# EAGLE board back (EAGLE 6.5.0)

Size 100 x 80 mm. Coordinates in mm from the lower left corner, seen from the top.
Outline: 0,0 100,0 100,80 0,80 0,0
Copper layers (1*16): Top 0.035mm / dielectric 1.5mm / Bottom 0.035mm
Design rules "default": minimum track width 10mil, minimum drill 24mil, track to track 8mil, track to pad 8mil, pad to pad 8mil, via to via 8mil, smd to smd 8mil, copper to edge 40mil, drill to drill 8mil, minimum pad ring 10mil, minimum via ring 8mil, stop-mask expansion 4mil, vias tented up to drill 0mil, thermal gap 10mil

## Footprints (pad centres in the part's own frame; a part is rotated, then mirrored left to right if it is on the bottom)
0805 = smd 0.8 x 1.2: 1 -0.9,0; 2 0.9,0
QFP80P1200X1200X120-44N = smd 1.55 x 0.55: 1 -5.75,4; 2 -5.75,3.2; 3 -5.75,2.4; 4 -5.75,1.6; 5 -5.75,0.8; 6 -5.75,0; 7 -5.75,-0.8; 8 -5.75,-1.6; 9 -5.75,-2.4; 10 -5.75,-3.2; 11 -5.75,-4; 23 5.75,-4; 24 5.75,-3.2; 25 5.75,-2.4; 26 5.75,-1.6; 27 5.75,-0.8; 28 5.75,0; 29 5.75,0.8; 30 5.75,1.6; 31 5.75,2.4; 32 5.75,3.2; 33 5.75,4 | smd 0.55 x 1.55: 12 -4,-5.75; 13 -3.2,-5.75; 14 -2.4,-5.75; 15 -1.6,-5.75; 16 -0.8,-5.75; 17 0,-5.75; 18 0.8,-5.75; 19 1.6,-5.75; 20 2.4,-5.75; 21 3.2,-5.75; 22 4,-5.75; 34 4,5.75; 35 3.2,5.75; 36 2.4,5.75; 37 1.6,5.75; 38 0.8,5.75; 39 0,5.75; 40 -0.8,5.75; 41 -1.6,5.75; 42 -2.4,5.75; 43 -3.2,5.75; 44 -4,5.75
SOT23-5 = smd 0.69 x 0.99: 1 -0.95,-1.29; 2 0,-1.29; 3 0.95,-1.29; 4 0.95,1.3; 5 -0.95,1.3
JST-3-PTH = drill 0.7 pad 1.626: 1 -2,-5; 2 0,-5; 3 2,-5
L0402 = smd 0.5 x 0.5: 1 -0.508,0; 2 0.508,0
HX1 = drill 0.8 square: 0V 25.4,-8.89; EN 20.32,-8.89; RFGND1 0,-8.89; RFGND2 5.08,-8.89; RFOUT 2.54,-8.89; TXD 27.94,-8.89; VCC 22.86,-8.89 | smd 0.813 x 1.676: BODYGND1 -1.905,8.255; BODYGND2 36.195,8.255
04P = drill 0.914 long: 1 -3.81,0; 2 -1.27,0; 3 1.27,0; 4 3.81,0
MS5611-01BA01 = smd 1.3 x 0.6: 1 -1.2,1.875; 2 -1.2,0.625; 3 -1.2,-0.625; 4 -1.2,-1.875; 5 1.2,-1.875; 6 1.2,-0.625; 7 1.2,0.625; 8 1.2,1.875
M10382-A1 = smd 1 x 2: 1 -1.05,12.1; 2 -2.65,12.1; 3 -4.25,12.1; 18 -1.6,-11.7; 19 0,-11.7; 20 1.6,-11.7; 35 4.25,12.1; 36 2.65,12.1 | smd 2 x 1: 4 -4.75,9.6; 5 -4.75,8; 6 -4.75,6.4; 7 -4.75,4.8; 8 -4.75,3.2; 9 -4.75,1.6; 10 -4.75,0; 11 -4.75,-1.6; 12 -4.75,-3.2; 13 -4.75,-4.8; 14 -4.75,-6.4; 15 -4.75,-8; 16 -4.75,-9.6; 17 -4.75,-11.2; 21 4.75,-11.2; 22 4.75,-9.6; 23 4.75,-8; 24 4.75,-6.4; 25 4.75,-4.8; 26 4.75,-3.2; 27 4.75,-1.6; 28 4.75,0; 29 4.75,1.6; 30 4.75,3.2; 31 4.75,4.8; 32 4.75,6.4; 33 4.75,8; 34 4.75,9.6
CR-123-A_HOLDER = drill 1.5: + -19.05,0; - 19.05,0 | drill 2: P$3 -19.05,8.128 | drill 3.2: P$4 -12.751,0; P$5 12.751,0
AVR-ISP-6 = drill 1.016 square: 1 -2.54,-1.27 | drill 1.016 octagon: 2 -2.54,1.27; 3 0,-1.27; 4 0,1.27; 5 2.54,-1.27; 6 2.54,1.27
BU-SMA-V = drill 1.27: 1 0,0 | drill 1.778: 2 -2.55,2.55; 3 2.55,2.55; 4 2.55,-2.55; 5 -2.55,-2.55

## Placement (x,y rotation side)
C1  22pF  [0805]  -24.13,-269.24 0 top  (outside the outline)
C2  22pF  [0805]  -27.94,-269.24 0 top  (outside the outline)
C3  22pF  [0805]  -31.75,-269.24 0 top  (outside the outline)
C5  22pF  [0805]  -39.37,-269.24 0 top  (outside the outline)
C6  18pF  [0805]  -43.18,-269.24 0 top  (outside the outline)
C7  100nF  [0805]  -46.99,-308.61 0 top  (outside the outline)
IC1  [QFP80P1200X1200X120-44N]  36.83,21.59 0 top
IC2  74AHC1G125DBV  [SOT23-5]  -62.23,-306.07 0 top  (outside the outline)
IC3  74AHC1G125DBV  [SOT23-5]  -71.12,-316.23 0 top  (outside the outline)
JP1  [JST-3-PTH]  -69.85,-331.47 0 top  (outside the outline)
JP2  [JST-3-PTH]  -69.85,-340.36 0 top  (outside the outline)
JP3  [JST-3-PTH]  -69.85,-349.25 0 top  (outside the outline)
L3  FB_0402  [L0402]  -41.91,-284.48 0 top  (outside the outline)
L4  FB_0402  [L0402]  -41.91,-289.56 0 top  (outside the outline)
M1  HX1  [HX1]  -39.37,-300.99 0 top  (outside the outline)
MPU  [04P]  -68.58,-326.39 0 top  (outside the outline)
U$1  MS5611QFN  [MS5611-01BA01]  -3.81,-12.7 0 top  (outside the outline)
U$2  M10382-A1  [M10382-A1]  -16.51,-1.27 0 top  (outside the outline)
U$3  123_BATTERY_HOLDERCR-123-A  [CR-123-A_HOLDER]  10.16,-40.64 0 top  (outside the outline)
U$4  123_BATTERY_HOLDERCR-123-A  [CR-123-A_HOLDER]  10.16,-85.09 0 top  (outside the outline)
U$5  123_BATTERY_HOLDERCR-123-A  [CR-123-A_HOLDER]  10.16,-129.54 0 top  (outside the outline)
U$6  123_BATTERY_HOLDERCR-123-A  [CR-123-A_HOLDER]  10.16,-173.99 0 top  (outside the outline)
U$7  123_BATTERY_HOLDERCR-123-A  [CR-123-A_HOLDER]  10.16,-218.44 0 top  (outside the outline)
U$8  123_BATTERY_HOLDERCR-123-A  [CR-123-A_HOLDER]  10.16,-262.89 0 top  (outside the outline)
U$9  AVR-PDIVERT  [AVR-ISP-6]  17.78,7.62 0 top
X1  BU-SMA-V  [BU-SMA-V]  -53.34,-303.53 0 top  (outside the outline)

## Library data of the parts
C1-C3 C5-C7 = SparkFun
IC1 = xmega-a4
IC2 IC3 = 74xx-little-us
JP1-JP3 = SparkFun-Connectors
L3 L4 = rc-master-smd
M1 = trackuino
MPU = con-amp-quick; OC_FARNELL: unknown; OC_NEWARK: unknown
U$1-U$8 = SHC
U$9 = avr-7
X1 = con-coax; OC_FARNELL: unknown; OC_NEWARK: unknown

## Nets
5V: IC2.5 IC3.5 M1.VCC
AVCC: IC1.39
BATT: JP1.2 JP2.2 U$5.+ U$8.+
EN-5V: IC3.4 M1.EN
GC1: IC1.42 JP1.3
GC2: IC1.43 JP2.3
GND: C1.2 C2.2 C3.2 C5.2 C6.1 C6.2 C7.2 IC1.8 IC1.18 IC1.30 IC1.38 IC2.1 IC2.3 IC3.1 IC3.3 JP1.1 JP2.1 JP3.1 M1.0V M1.BODYGND1 M1.BODYGND2 M1.RFGND1 M1.RFGND2 MPU.4 U$1.2 U$1.3 U$1.4 U$1.5 U$2.1 U$2.2 U$2.3 U$2.4 U$2.12 U$2.14 U$2.17 U$2.21 U$2.24 U$2.26 U$2.28 U$2.33 U$2.34 U$2.35 U$2.36 U$3.- U$6.- U$9.6 X1.2 X1.3 X1.4 X1.5
MISOC: IC1.16 U$1.6
MOSIC: IC1.15 U$1.7
N$1: C1.1 L3.2 U$2.11
N$2: C2.1 L4.2 U$2.13
N$4: U$3.+ U$4.-
N$5: M1.RFOUT X1.1
N$6: U$4.+ U$5.-
N$8: U$6.+ U$7.-
N$9: U$7.+ U$8.-
PDI-CLK: IC1.35 U$9.5
PDI-DATA: IC1.34 U$9.1
RXC: IC1.12 L3.1
RXE: IC1.32 IC2.2
SCLKC: IC1.17 U$1.8
SCLKD: IC1.27 MPU.1
SDID: IC1.25 MPU.2
THERM: IC1.41 JP3.3
TXC: IC1.13 L4.1
TXD-5V: IC2.4 M1.TXD
TXE: IC1.33 IC3.2
VCC: C3.1 C5.1 C7.1 IC1.9 IC1.19 IC1.31 JP3.2 MPU.3 U$1.1 U$2.5 U$2.27 U$9.2

## Tracks (layer width: path | path; a pad name or v marks a point on that pad's centre or on a via)
5V  (2 unrouted)
BATT  (3 unrouted)
EN-5V  (1 unrouted)
GC1  (1 unrouted)
GC2  (1 unrouted)
GND  (49 unrouted)
MISOC  (1 unrouted)
MOSIC  (1 unrouted)
N$1  (2 unrouted)
N$2  (2 unrouted)
N$4  (1 unrouted)
N$5  (1 unrouted)
N$6  (1 unrouted)
N$8  (1 unrouted)
N$9  (1 unrouted)
PDI-CLK  (1 unrouted)
PDI-DATA  (1 unrouted)
RXC  (1 unrouted)
RXE  (1 unrouted)
SCLKC  (1 unrouted)
SCLKD  (1 unrouted)
SDID  (1 unrouted)
THERM  (1 unrouted)
TXC  (1 unrouted)
TXD-5V  (1 unrouted)
TXE  (1 unrouted)
VCC  (11 unrouted)